# Altium PCB LowPowerDevPCB.PcbDoc
Units mil, origin at the board's own origin, x right, y up, seen from the top; angles counter-clockwise.
Board outline 2192.24 x 2324.43 mil, 2 copper layers (Top Layer, Bottom Layer), stack 65.792 mil thick; 34 components, 41 nets, 185 pads, 177 vias.
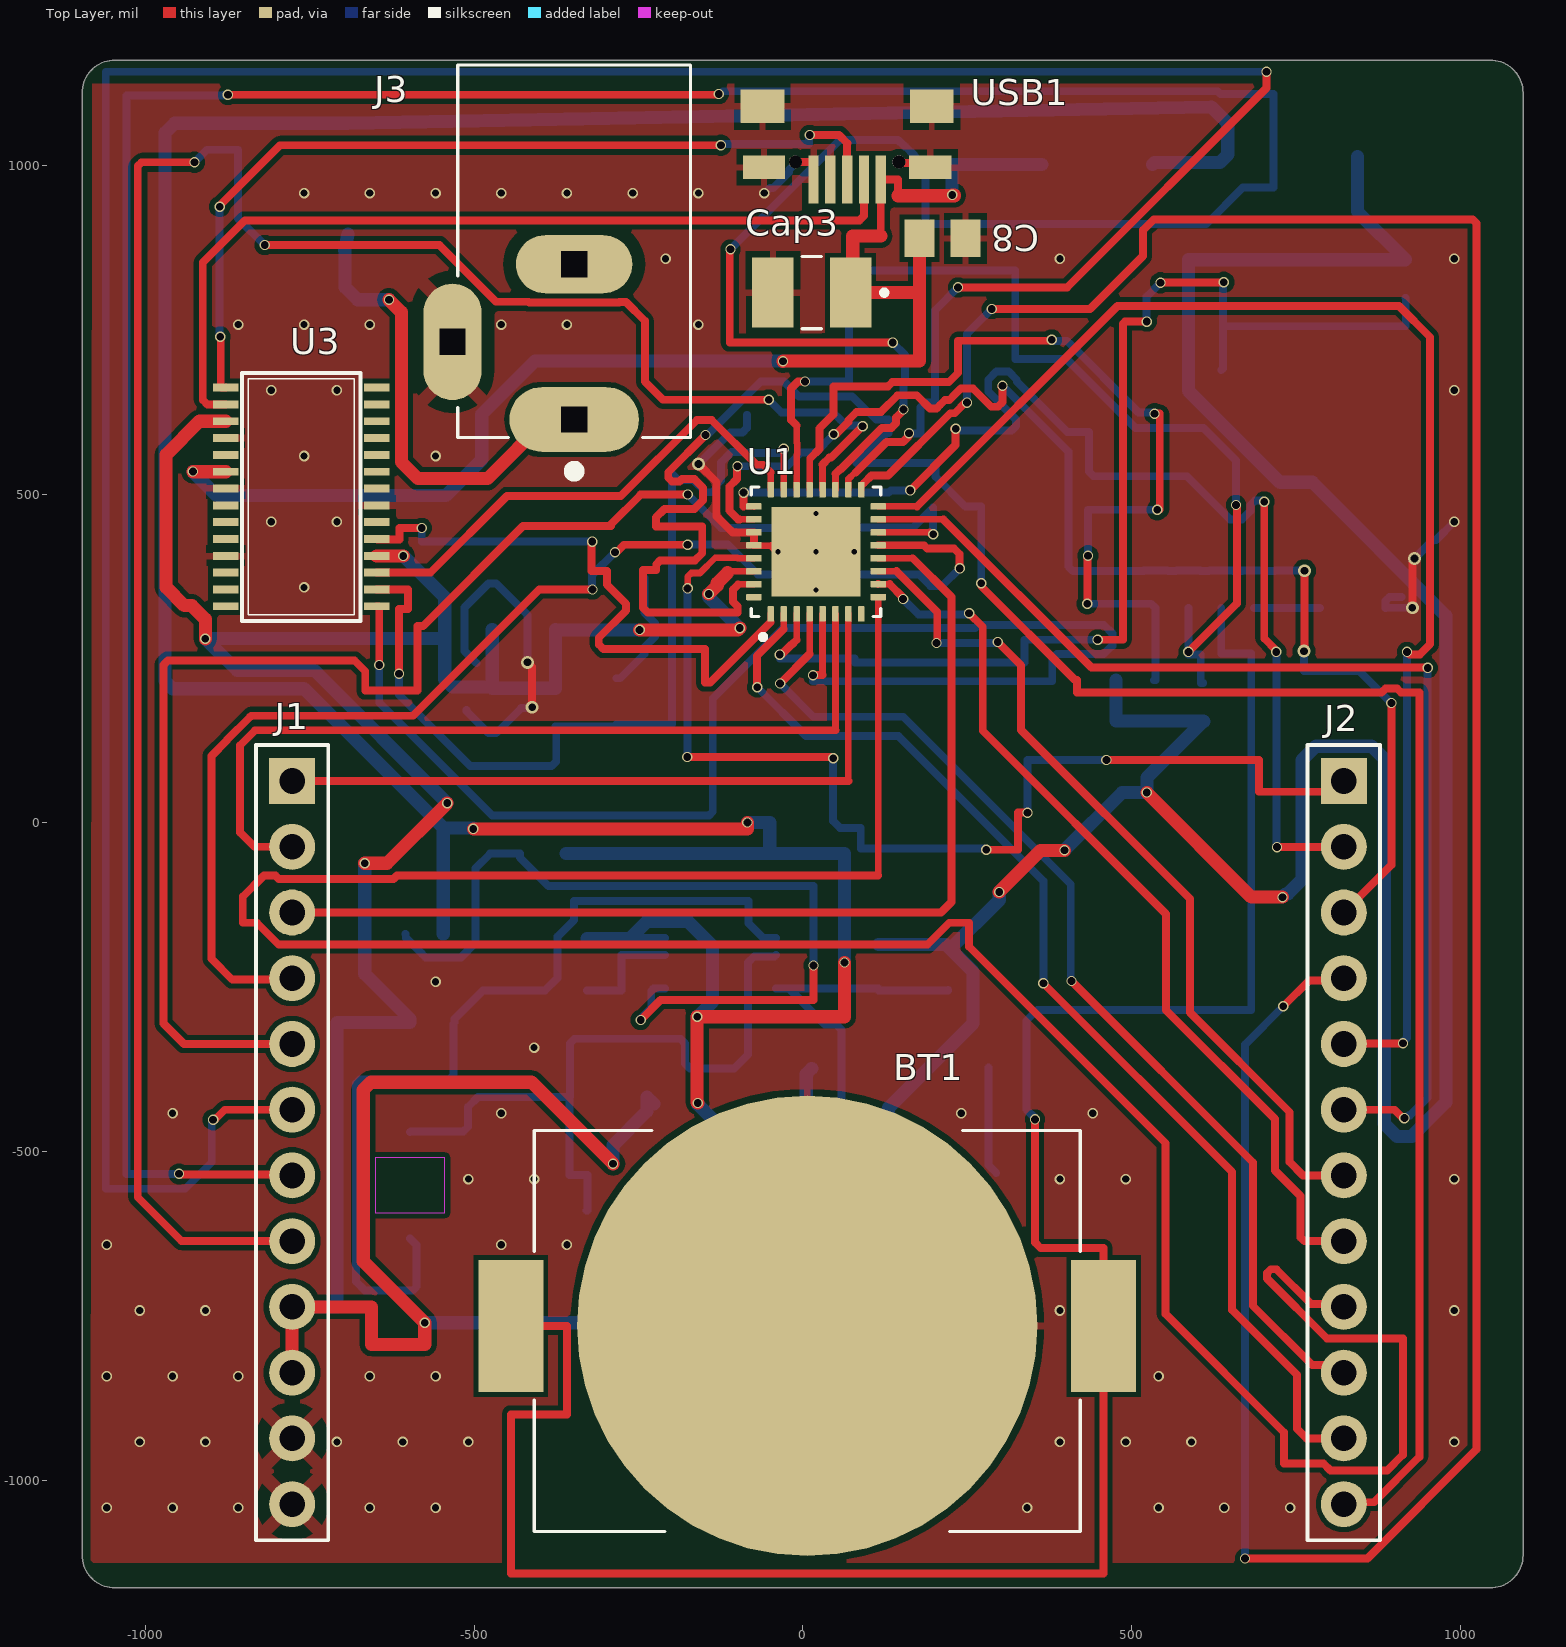
[diagram p0: Top Layer view]
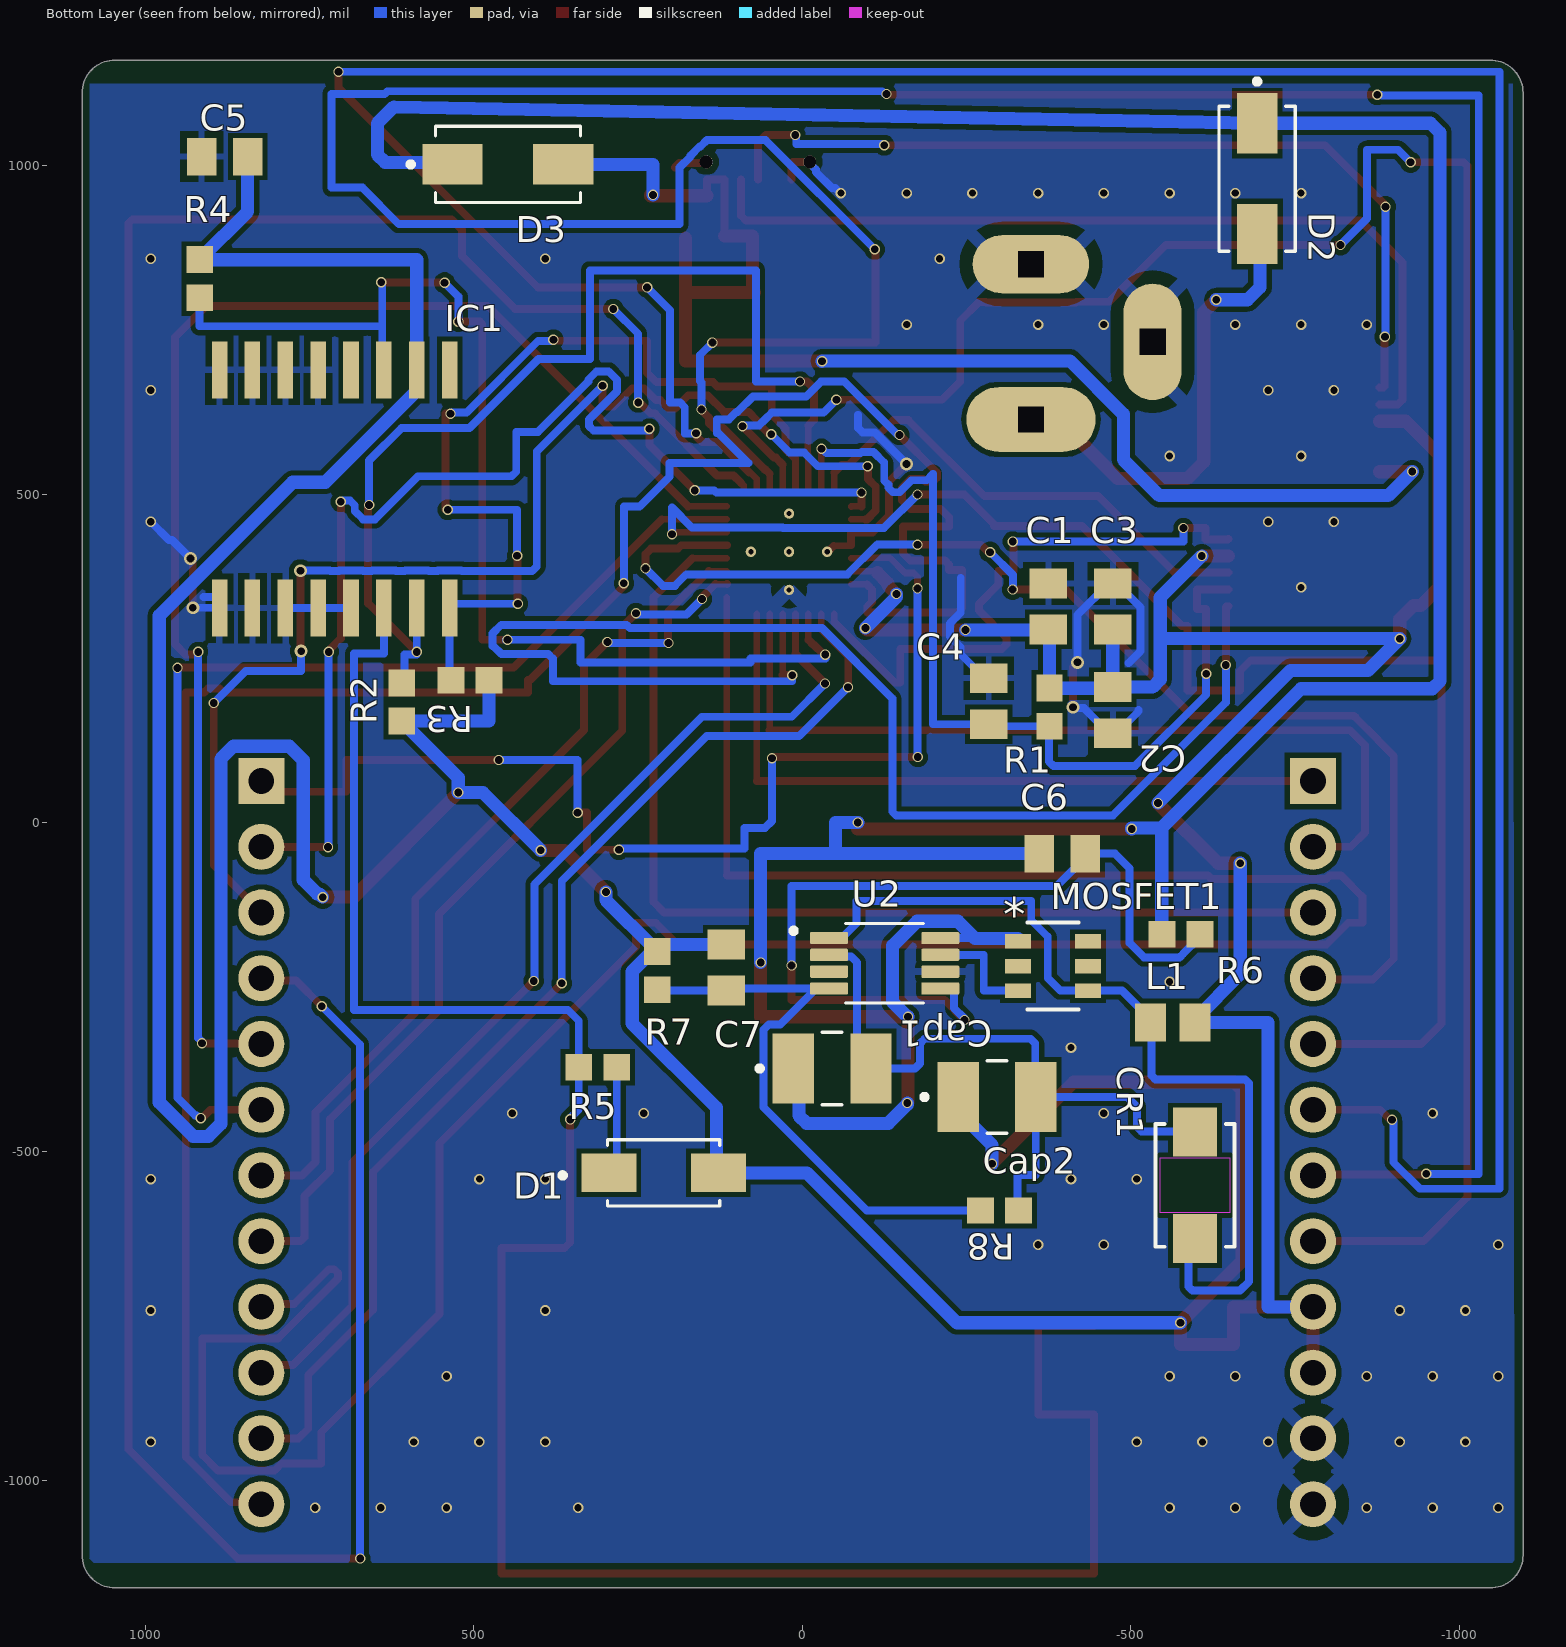
[diagram p1: Bottom Layer view, seen from below]
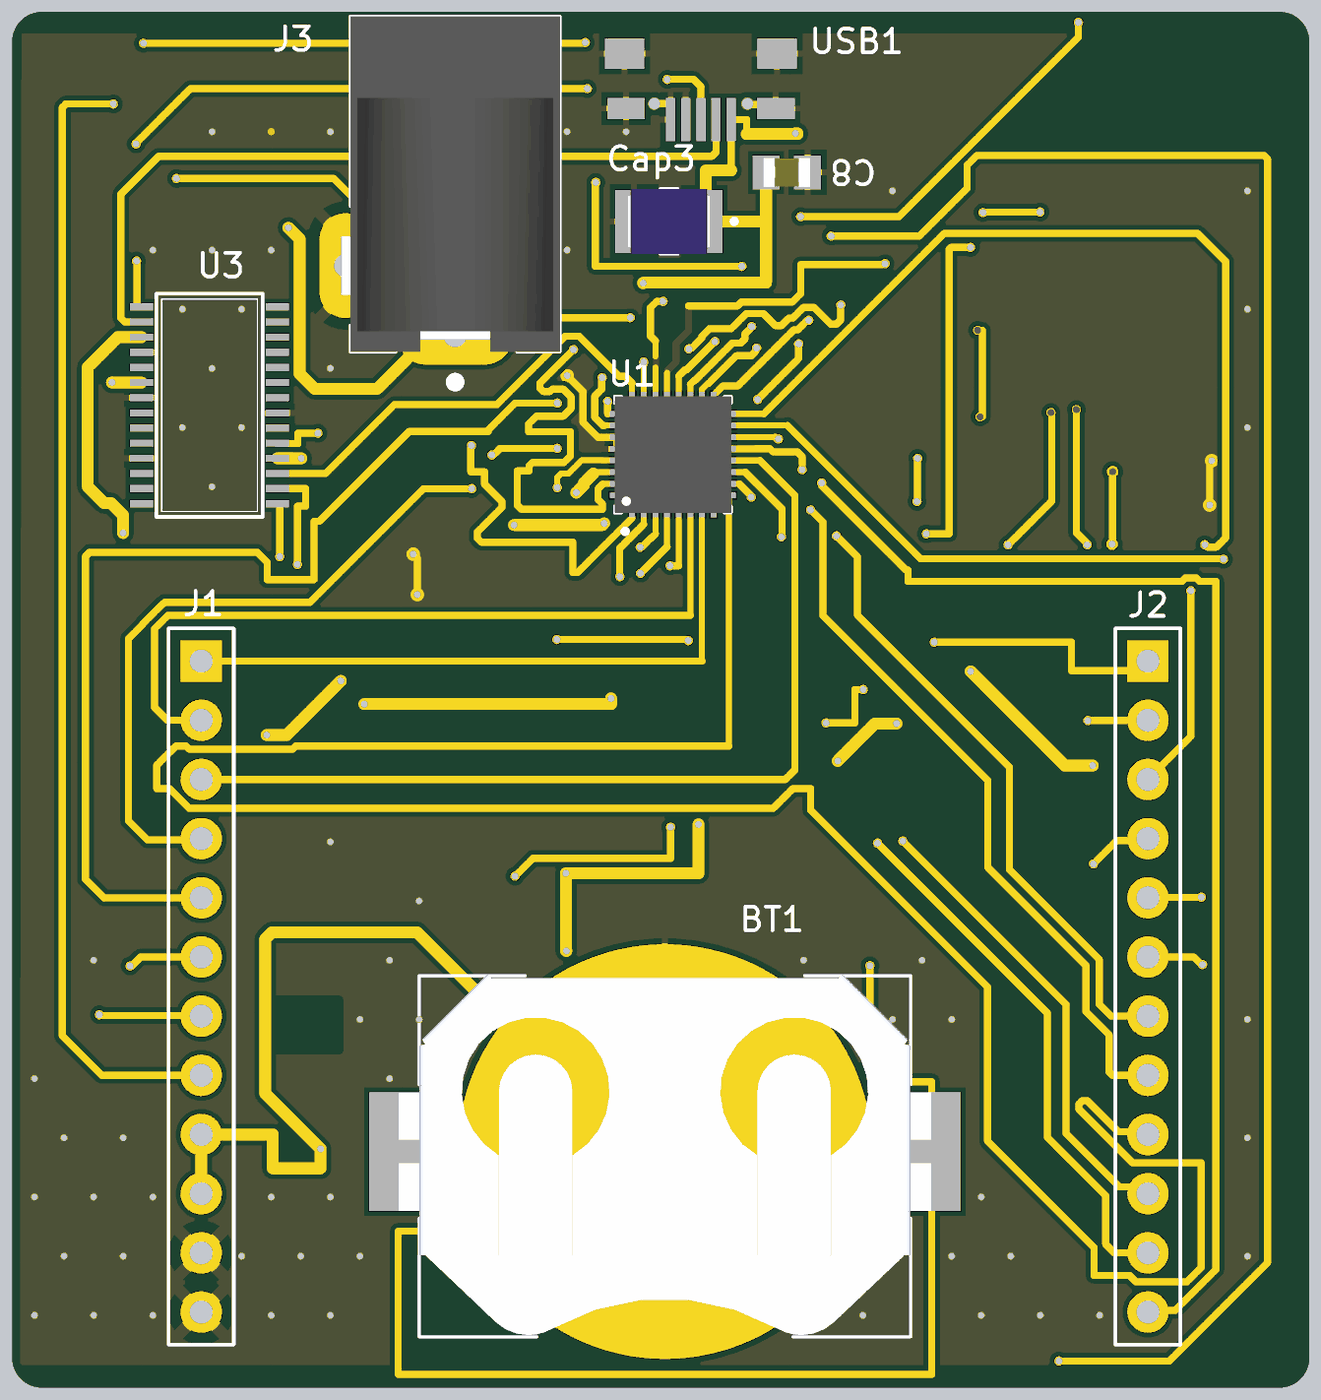
[diagram p2: 3D render of the assembled board from above, using the file's embedded part models]
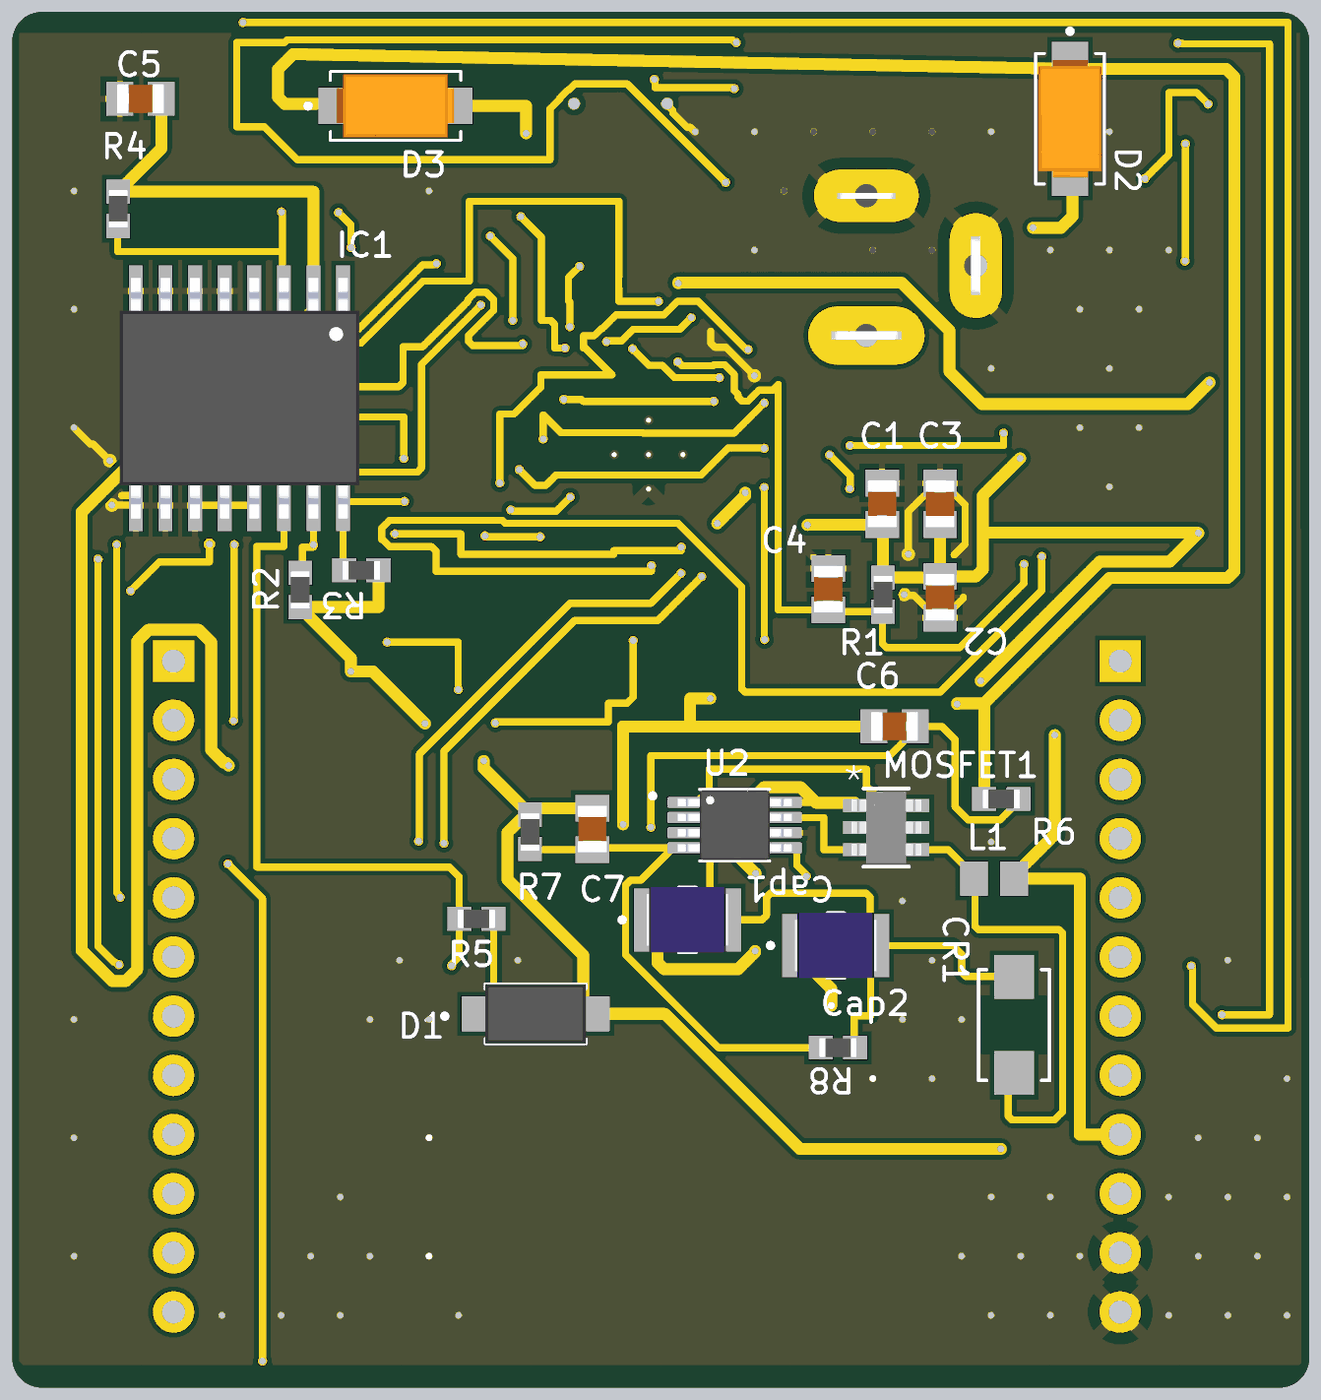
[diagram p3: 3D render of the assembled board from below, using the file's embedded part models]

## Layer stack, top to bottom
Top Solder: solder mask 0.4, Solder Resist, Dk 3.5
Top Layer: signal copper 1.4
Dielectric 1: dielectric 62.9921, FR-4, Dk 4.6
Bottom Layer: signal copper 1.4
Bottom Solder: solder mask 0.4, Solder Resist, Dk 3.5

## Board outline
-1046.49,-1163.8 1045.75,-1163.8 ccw(c1045.75,-1113.8) 1095.75,-1113.8 1095.75,1110.63 ccw(c1045.75,1110.63) 1045.75,1160.63 -1046.49,1160.63 ccw(c-1046.49,1110.63) -1096.49,1110.63 -1096.49,-1113.8 ccw(c-1046.49,-1113.8)

## Design rules (kind name [scope] priority, off if disabled: settings)
BoardOutlineClearance [All] p1: gap=7.87 ignorepadtopadclearanceinfootprint=FALSE
Clearance [All] p1: gap=7.87 ignorepadtopadclearanceinfootprint=TRUE
HoleSize [All] p1: absolutevalues=TRUE maxlimit=248.03 minlimit=7.87 maxpercent=80.000 minpercent=20.000
HoleToHoleClearance [All] p1: gap=19.68 allowstackedmicrovias=TRUE
MinimumSolderMaskSliver [All] p1: minsoldermaskwidth=3.94
PolygonConnect [All] p1: thpad.connectstyle=Relief thpad.reliefconductorwidth=19.68 thpad.reliefentries=4 thpad.polygonreliefangle="45 Angle" thpad.airgapwidth=19.68 smdpad.connectstyle=Relief smdpad.reliefconductorwidth=9.84 smdpad.reliefentries=4 smdpad.polygonreliefangle="90 Angle" smdpad.airgapwidth=9.84 via.connectstyle=Direct via.reliefconductorwidth=10 via.reliefentries=4 via.polygonreliefangle="90 Angle" via.airgapwidth=10
RoutingVias [All] p1: holewidth=11.81 width=19.68 viastyle="Through Hole" minholewidth=5.91 minwidth=9.84 maxholewidth=11.81 maxwidth=19.68
SilkToSilkClearance [All] p1: silktosilkclearance=5.91
SilkToSolderMaskClearance [IsPad] p1: minsilkscreentomaskgap=3.94 clearancetoexposedcopper=TRUE
SolderMaskExpansion [All] p1: expansion=1.5 istentingtop=FALSE
UnRoutedNet [All] p1: checkbadconnections=TRUE
Width [InNetClass('Other')] p1: maxlimit=15 minlimit=10 preferedwidth=12
Width Width_power [InNetClass('Power')] p2: maxlimit=25 minlimit=10 preferedwidth=20
24 further rules are at their usual default settings.

## Classes and differential pairs
net class Power: +3V3 +5V_USB +VBAT VIN
component class "USB Bridge": C8 U3 USB1
component class RTC: BT1 C5 D1 IC1 R2 R3 R4 R5
component class Power: C6 C7 Cap1 Cap2 Cap3 CR1 D2 D3 J3 L1 MOSFET1 R6 R7 R8 U2
component class MCU: C1 C2 C3 C4 J1 J2 R1 U1

## Components (designator, comment, footprint, x,y, rotation, side; value= is the part's Value field where it differs from the comment)
BT1 "BAT-HLD-001" BAT_BAT-HLD-001 6.76,-765.09 r0 top
C1 "Cap" Cap_0805 -374.51,329.49 r270 bottom
C2 "Cap" Cap_0805 -472.37,171.65 r90 bottom
C3 "Cap" Cap_0805 -472.37,329.39 r270 bottom
C4 "Cap" Cap_0805 -283.62,185.22 r90 bottom
C5 "Cap" Cap_0805 878.82,1013.88 r0 bottom
C6 "Cap" Cap_0805 -395.47,-46.72 r0 bottom
C7 "Cap" Cap_0805 115.36,-220 r90 bottom
C8 "Cap" Cap_0805 212.62,889.45 r180 top
Cap1 "Polarized_Cap" CAP_B3528 -45.41,-373.56 r180 bottom
Cap2 "Polarized_Cap" CAP_B3528 -296.15,-416.87 r180 bottom
Cap3 "Polarized_Cap" CAP_B3528 13.62,806.8 r180 top
CR1 "SS12-E3/61T" SMA(DO-214AC)_VIS -597.56,-551.2 r90 bottom
D1 "Diode" Diode_SMD 216.04,-532.28 r180 bottom
D2 "Diode" DO-214AC -692.02,980.14 r270 bottom
D3 "Diode" DO-214AC 447.85,1001.86 r180 bottom
IC1 "DS3231" SO16W 711.6,508 r0 bottom
J1 "DW-12-13-T-S-827" CONN12-07-F-S-200_SAI -776.96,63.76 r270 top
J2 "DW-12-13-T-S-827" CONN12-07-F-S-200_SAI 823.04,63.76 r270 top
J3 "PJ-002B" CUI_PJ-002B -347.86,613.85 r90 top
L1 "MLZ2012N220LT000" "IND - 0805" -563.62,-303.72 r180 bottom value="22 μH"
MOSFET1 "FDC5614P" TSOT23-6_419BL_ONS -381.39,-217.65 r180 bottom
R1 "Resistor" Res_0603 -376.13,176.07 r90 bottom
R2 "Resistor" Res_0603 609.22,183.93 r270 bottom
R3 "Resistor" Res_0603 505.59,217.19 r180 bottom
R4 "Resistor" Res_0603 916.54,827.97 r270 bottom
R5 "Resistor" Res_0603 311.2,-371.77 r180 bottom
R6 "Resistor" Res_0603 -575.87,-169.18 r0 bottom
R7 "Resistor" Res_0603 220.77,-224.78 r270 bottom
R8 "Resistor" Res_0603 -299.88,-589.55 r0 bottom
U1 "MSP430G2x53 QFN-32" MSP430G2x53_QFN 20.17,412.6 r90 top
U2 "LM3485MM" SOP65P490X110-8N -125.28,-213.45 r180 bottom
U3 "PL2303HX" TSSOP28 -767.11,485.34 r180 top
USB1 "USB_Socket" "MICRO QTZB5.0" 67.47,978.66 r180 top

## Footprints (in the part's own frame and the unit in brackets; to place one, negate y for a bottom-side part, rotate by r counter-clockwise, add the part's x,y. Pads: shape width x height; smd on the part's side, far side on the other; paste and mask are expansions set on the pad)
BAT_BAT-HLD-001 [mm]
  round 17.8 smd paste-10: N-(0,0)
  rect 2.5x5.1 smd: P+(-11.45,0) P+(11.45,0)
  silkscreen extent -10.55,-7.95 10.55,7.55, body extent -11.43,-7.87 11.43,7.62, height 4.32
Cap_0805 [mm]
  rect 1.15x1.45 smd: 1(-0.889,0) 2(0.889,0)
  body extent -1,-0.62 1.01,0.63, height 0.94
CAP_B3528 [mm]
  rect 1.6x2.7 smd: 1(-1.5,0) 2(1.5,0)
  silkscreen extent -2.9,-1.4 0.38,1.4, body extent -1.75,-1.4 1.75,1.4, height 1.9
CONN12-07-F-S-200_SAI [mil]
  rect 70x70 hole 39: 1(0,0)
  round 70 hole 39: 2(100,0) 3(200,0) 4(300,0) 5(400,0) 6(500,0) 7(600,0) 8(700,0) 9(800,0) 10(900,0) 11(1000,0) 12(1100,0)
  silkscreen extent -55,-55 1155,55
CUI_PJ-002B [mm]
  oval 2.5x5 hole 1 square: 1(0,0)
  oval 2.25x4.5 hole 1 square: 2(6,0)
  oval 4.5x2.25 hole 1 square: 3(3,4.7)
  silkscreen extent -2.2,-4.5 13.7,4.5, body extent -0.7,-4.5 13.7,4.9, height 11
Diode_SMD [mm]
  rect 2.12x1.5 smd: A(2.242,0) C(-1.988,0)
  silkscreen extent -3.87,-1.28 2.29,1.28, body extent -2.44,-1.28 2.7,1.28, height 1.15
DO-214AC [mm]
  rect 2.33x1.56 smd: A(2.14,0) C(-2.14,0)
  silkscreen extent -3.85,-1.47 2.8,1.48, body extent -2.53,-1.35 2.52,1.35, height 2.37
"IND - 0805" [mm]
  rect 1.2x1.47 smd: 1(-0.86,0) 2(0.86,0)
"MICRO QTZB5.0" [mm] "MICRO QTZB5.0"
  rect 0.4x1.85 smd: 1(-1.3,0) 2(-0.65,0) 3(0,0) 4(0.65,0) 5(1.3,0)
  round 0.5 hole 0.5 paste+0 mask+0: NC1(-2,-0.685) NC2(2,-0.685)
  rect 1.625x0.9 smd: SH1(-3.212,-0.475) SH2(3.213,-0.475)
  rect 1.69x1.3 smd: SH3(-3.27,-2.835) SH6(3.27,-2.835)
MSP430G2x53_QFN [mm] "32 PIN QFN."
  rrect25% 0.6x0.25 smd mask+0: 1(-2.4,1.75) 2(-2.4,1.25) 3(-2.4,0.75) 4(-2.4,0.25) 5(-2.4,-0.25) 6(-2.4,-0.75) 7(-2.4,-1.25) 8(-2.4,-1.75) 17(2.4,-1.75) 18(2.4,-1.25) 19(2.4,-0.75) 20(2.4,-0.25) 21(2.4,0.25) 22(2.4,0.75) 23(2.4,1.25) 24(2.4,1.75)
  rrect25% 0.25x0.6 smd mask+0: 9(-1.75,-2.4) 11(-0.75,-2.4) 12(-0.25,-2.4) 13(0.25,-2.4) 14(0.75,-2.4) 15(1.25,-2.4) 16(1.75,-2.4) 25(1.75,2.4) 26(1.25,2.4) 27(0.75,2.4) 28(0.25,2.4) 29(-0.25,2.4) 30(-0.75,2.4) 31(-1.25,2.4) 32(-1.75,2.4)
  rrect25% 0.25x0.6 smd mask+0.038: 10(-1.25,-2.4)
  rect 3.45x3.45 smd paste-3 mask+0: 33(0,0)
  round 0.4 hole 0.2 mask+0: 34(0,0) 35(0,1.475) 36(-1.475,0) 37(0,-1.475) 38(1.475,0)
  silkscreen extent -3.39,-2.5 2.5,2.5, body extent -2.5,-2.5 2.5,2.5, height 0.99
Res_0603 [mm]
  rect 1.04x1.02 smd: 1(-0.735,0) 2(0.735,0)
  body extent -0.8,-0.4 0.8,0.4, height 0.55
SMA(DO-214AC)_VIS [mil]
  rect 74x67 smd paste+0 mask+0: 1(-81,0) 2(81,0)
  Top Layer keep-out region: -42,-53 -42,53 42,53 42,-53
  Keep-Out Layer region: -42,-53 -42,53 42,53 42,-53
  silkscreen extent -94,-60 93,60
SO16W [mm]
  rect 0.6x2.2 smd: 1(-4.445,-4.6) 2(-3.175,-4.6) 3(-1.905,-4.6) 4(-0.635,-4.6) 5(0.635,-4.6) 6(1.905,-4.6) 7(3.175,-4.6) 8(4.445,-4.6) 9(4.445,4.6) 10(3.175,4.6) 11(1.905,4.6) 12(0.635,4.6) 13(-0.635,4.6) 14(-1.905,4.6) 15(-3.175,4.6) 16(-4.445,4.6)
  body extent -5.15,-5.16 5.15,5.16, height 2.65
SOP65P490X110-8N [mm]
  rrect25% 1.47x0.48 smd: 1(-2.15,0.975) 2(-2.15,0.325) 3(-2.15,-0.325) 4(-2.15,-0.975) 5(2.15,-0.975) 6(2.15,-0.325) 7(2.15,0.325) 8(2.15,0.975)
  silkscreen extent -3.62,-1.54 1.5,1.53, body extent -2.45,-1.5 2.45,1.5, height 1.1
TSOT23-6_419BL_ONS [mil]
  rect 39.5x22 smd paste+0 mask+0: 1(-53.25,37.4) 2(-53.25,0) 3(-53.25,-37.4) 4(53.25,-37.4) 5(53.25,0) 6(53.25,37.4)
  silkscreen extent -38,-66 39,66, body extent -59,-61 59,61, height 43
TSSOP28 [mil]
  rect 39x12 smd: 1(-119.01,155.71) 2(-119.01,130.12) 3(-119.01,104.53) 4(-119.01,78.94) 5(-119.01,53.35) 6(-119.01,27.76) 7(-119.01,2.17) 8(-119.01,-23.42) 9(-119.01,-49.02) 10(-119.01,-74.61) 11(-119.01,-100.2) 12(-119.01,-125.79) 13(-119.01,-151.38) 14(-119.01,-176.97) 15(110.74,-176.97) 16(110.74,-151.38) 17(110.74,-125.79) 18(110.74,-100.2) 19(110.74,-74.61) 20(110.74,-49.02) 21(110.74,-23.42) 22(110.74,2.17) 23(110.74,27.76) 24(110.74,53.35) 25(110.74,78.94) 26(110.74,104.53) 27(110.74,130.12) 28(110.74,155.71)
  silkscreen extent -94,-199 86,178

## Part data
BT1: "Battery Retainer Coin, 20.0mm 1 Cell SMD (SMT) Tab", Package=None, Availability=Unavailable, MP=BAT-HLD-001, Price=None
C1 C2: Capacitance="47 µF"
C3: Capacitance=100nF
C4: Capacitance="1 nF"
C5: Capacitance=1.0μF
CR1: "No Description Available", Mfr_Name=Vishay
IC1: "Real Time Clock (RTC) IC Clock/Calendar - IÂ²C, 2-Wire Serial 8-SOIC (0.154, 3.90mm Width)", Package="SOIC-16 Maxim Integrated", Availability="In Stock", Check_prices=https://www.snapeda.com/parts/DS3231/Maxim+Integrated/view-part/?ref=eda, MF="Maxim Integrated", MP=DS3231, Price=None, Purchase-URL=https://pricing.snapeda.com/search/part/DS3231/?ref=eda, SnapEDA_Link=https://www.snapeda.com/parts/DS3231/Maxim+Integrated/view-part/?ref=snap
J1 J2: "No Description Available", Mfr_Name="Samtec Inc", RefDes=RefDes, Type=Type
J3: "2.5 x 6.5 mm, 2.5 A, Horizontal, Through Hole, Dc Power Jack Connector", Package=None, Availability="In Stock", Check_prices=https://www.snapeda.com/parts/PJ-002B/CUI+Devices/view-part/?ref=eda, CUI_purchase_URL=https://www.cuidevices.com/product/interconnect/connectors/dc-power-connectors/jacks/pj-002b?utm_source=snapeda.com&utm_medium=referral&utm_campaign=snapedaBOM, MF="CUI Devices", MP=PJ-002B, Price=None, Purchase-URL=https://pricing.snapeda.com/search/part/PJ-002B/?ref=eda, SnapEDA_Link=https://www.snapeda.com/parts/PJ-002B/CUI+Devices/view-part/?ref=snap
L1: "22ÂµH Shielded Multilayer Inductor 300mA 670mOhm 0805 (2012 Metric)", Package="2012 Bourns", Availability="In Stock", Check_prices=https://www.snapeda.com/parts/MLZ2012N220LT000/TDK/view-part/?ref=eda, MF=TDK, MP=MLZ2012N220LT000, Price=None, Purchase-URL=https://pricing.snapeda.com/search/part/MLZ2012N220LT000/?ref=eda, SnapEDA_Link=https://www.snapeda.com/parts/MLZ2012N220LT000/TDK/view-part/?ref=snap
MOSFET1: "No Description Available", Mfr_Name=onsemi, RefDes=RefDes, Type=Type
R2 R3: Resistance=2.6kΩ
R4: Resistance=4.7kΩ
R5: Resistance=200Ω
U1: "QFN-32-EP(5x5) Microcontroller Units (MCUs/MPUs/SOCs) ROHS. Texas Instruments.", Package=None, Availability=Unavailable, ComponentLink1Description=LSCS, ComponentLink1URL=https://www.lcsc.com/product-detail/Microcontroller-Units-MCUs-MPUs-SOCs_Texas-Instruments-MSP430G2553IRHB32R_C27832.html, MP=MSP430G2553IRHB32R, Price=None
U2: "4.5-35V, Hysteretic Non-Synchronous PFET Buck Controller", Package="VSSOP-8 Texas Instruments", Availability="In Stock", Check_prices=https://www.snapeda.com/parts/LM3485MMX/NOPB/Texas+Instruments/view-part/?ref=eda, MF="Texas Instruments", MP=LM3485MMX/NOPB, Price=None, Purchase-URL=https://pricing.snapeda.com/search?q=LM3485MMX/NOPB&ref=eda, SnapEDA_Link=https://www.snapeda.com/parts/LM3485MMX/NOPB/Texas+Instruments/view-part/?ref=snap
U3: "USB to RS232 TSSOP28", Package=None, Availability=Unavailable, MF="Prolific Technology", MP=PL-2303HX, Price=None, SnapEDA_Link=https://www.snapeda.com/parts/PL-2303HX/Prolific%20Technology/view-part/598561/?ref=snap
C6: Parameter 1=1nF
C7: Parameter 1=100pF
C8: Parameter 1=100nF
Cap1: Parameter 1=100μF
Cap2: Parameter 1=22μF
Cap3: Parameter 1=10μF
R1: Parameter 1=10kΩ
R6: Parameter 1=240kΩ
R7: Parameter 1=33kΩ
R8: Parameter 1=20kΩ

## Via types
v1: diameter 15.75, hole 11.81, Top Layer to Bottom Layer, 102 vias
v2: diameter 16, hole 11, Top Layer to Bottom Layer, tented both sides, 68 vias
v3: diameter 19.68, hole 11.81, Top Layer to Bottom Layer, 7 vias

## Nets (pads, with @x,y where several pads share a name; then routed paths per layer and width w, separated by ;. In a path a pad name is that pad's centre, name@x,y a point inside that pad or via, vN(x,y) a via of type N, cw(c..) or ccw(c..) an arc to the next point about the centre after c; other vN are vias at no path point)
+3V3: C1.2 C2.2 C3.2 C5.1 C7.2 Cap2.1 D1.A IC1.2 J1.9 J1.10 L1.2 R1.2 R2.2 R3.2 R4.1 R7.1 U1.30 U3.4 U3.17 | length 10076.4
  Top Layer w10: -114.36,380.57 -110.82,380.57 -108.32,383.07 U1.30
  Top Layer w20: v1(-908.96,280.17) -908.96,309.96 -929.72,330.72 -940.85,330.72 -968.67,358.53 -968.67,560.45 -918,611.12 U3.17 ; J1.10 J1.9 -655.91,-736.24 -655.91,-793.48 -575.18,-793.48 v1(-575.18,-760.46) -668.8,-666.84 -668.8,-406.11 -657.09,-394.39 -412.61,-394.39 -291.48,-515.53 v1(-288.64,-518.36) ; v1(-666.36,-61.24) -632.56,-61.24 v1(-541.08,30.24) ; U3.4 -621.17,406.4 -621.06,406.29 v1(-607.82,406.29) ; v1(-248.31,293.7) -98.72,293.7 v1(-95.97,296.46) ; v1(-143.1,348.3) -130.1,361.29 -130.1,364.82 -114.36,380.57 ; v1(298.84,-104.93) 362.08,-41.69 v1(398.08,-41.69) ; v1(523.4,46.3) 682.55,-112.85 v1(729.74,-112.85)
  Bottom Layer w20: J1.9 -708.5,-736.24 -708.5,-303.72 L1.2 -597.48,-298.41 -666.36,-229.52 v1(-666.36,-61.24) ; v1(-607.82,406.29) -544.61,343.08 -544.61,280.72 ; v1(-575.18,-760.46) -235.22,-760.46 -7.05,-532.28 D1.A 130.55,-529.5 130.55,-433.38 258.72,-305.21 258.72,-225.84 R7.1@224.55,-191.67 ; v1(-541.08,30.24) -742.86,232.02 -860.81,232.02 v1(-908.96,280.17) -907.5,280.17 -906.95,280.72 -544.61,280.72 ; C2.2@-472.37,205.01 R1.2 -376.13,294.49 -375.46,293.82 -248.43,293.82 v1(-248.31,293.7) ; C3.2 C2.2 -532.89,206.65 -544.61,218.36 -544.61,280.72 ; v1(-288.64,-518.36) -288.64,-490.08 -237.09,-438.53 Cap2.1 Cap2.1@-226.73,-427.24 ; v1(-143.1,348.3) -143.1,343.59 v1(-95.97,296.46) ; C7.2 217.88,-185 R7.1@224.55,-191.67 ; v1(298.84,-104.93) 298.84,-117.38 R7.1@224.55,-191.67 ; v1(398.08,-41.69) 486.06,46.3 v1(523.4,46.3) 523.4,68.78 609.22,154.6 R2.2 ; R3.2 476.65,155 R2.2 ; R2.2@609.94,154.28 R2.2 ; v1(729.74,-112.85) 734.6,-108 738.07,-108 759.35,-86.71 759.35,95.35 780.64,116.63 865.44,116.63 884.6,97.47 884.6,-457.61 903.76,-476.77 926.72,-476.77 978.36,-425.13 978.36,315.53 775.47,518.42 725.78,518.42 586.6,657.61 IC1.2 586.6,856.91 913.82,856.91 R4.1 916.55,857.3 843.82,930.03 C5.1
+5V_USB: C8.2 Cap3.1 D3.A U3.20 USB1.1 | length 2127.2
  Top Layer w12: 118.65,892.82 USB1.1 144.87,978.66 144.87,954.19
  Top Layer w20: v1(-927.85,534.58) -927.62,534.35 U3.20 ; v1(-30.07,702.3) -30.07,703.03 177.62,703.03 177.62,806.8 ; Cap3.1 Cap3.1@75.91,806.8 ; 118.65,892.82 75.91,892.82 Cap3.1@75.91,806.8 ; 144.87,954.19 230.55,954.19 230.55,955.51 v1(227.23,955.51) ; C8.2 177.62,806.8 ; Cap3.1@75.91,806.8 177.62,806.8
  Bottom Layer w20: v1(-927.85,534.58) -891.28,498 -543.29,498 -488.49,552.8 -488.49,621.78 -407.24,703.03 -30.07,703.03 v1(-30.07,702.3) ; v1(227.23,955.51) 227.23,1001.86 D3.A
+VBAT: D2.A J3.1 | length 721.7
  Top Layer w20: v1(-629.58,795.92) -610.72,777.06 -610.72,549.13 -585.38,523.79 -479.65,523.79 -389.6,613.85 J3.1
  Bottom Layer w20: D2.A -697.21,871.33 -696.31,870.43 -696.31,814.98 -677.25,795.92 v1(-629.58,795.92)
GND: BT1.N- C1.1 C2.1 C3.1 C4.2 C5.2 C8.1 Cap3.2 IC1.5 IC1.6 IC1.7 IC1.8 IC1.9 IC1.10 IC1.11 IC1.12 IC1.13 J1.11 J1.12 J3.2 J3.3 U1.27 U1.28 U1.33 U1.34 U1.35 U1.36 U1.37 U1.38 U2.6 U3.7 U3.18 U3.21 U3.25 USB1.4 USB1.5 USB1.NC1 USB1.NC2 USB1.SH1 USB1.SH2 USB1.SH3 USB1.SH6 | length 1534
  Top Layer w10: U1.28 -73.43,421.55 -47.86,421.55
  Top Layer w12: v3(-418.69,244.44) -411.77,237.52 v3(-411.77,176.07) ; v3(-158.56,545.96) -131.68,519.07 -131.68,466.99 -106.52,441.83 -74.61,441.83 U1.27 U1.28 ; -47.86,421.55 -38.91,412.6 U1.35 ; USB1.NC2 14.41,1005.63 16.28,1003.76 USB1.5 ; USB1.NC1 147.68,1004.16 187.15,1004.16 USB1.SH1 ; v3(927.31,327.39) 927.31,396.78 930.77,400.24 v3(930.77,402.32)
  Bottom Layer w12: -511.74,171.65 -511.74,170.11 -478.27,136.65 C2.1 -466.46,136.65 -428.51,174.6 -413.24,174.6 v3(-411.77,176.07) ; -496.24,243.16 -514.79,261.7 -514.79,327.88 -478.28,364.39 C3.1 -466.47,364.39 -418.69,316.62 v3(-418.69,244.44) ; C4.2 -277.72,220.22 -241.09,256.85 -241.09,267.15 -224.43,283.81 -224.43,303.59 -241.09,320.24 -241.09,372.48 ; v3(-158.56,545.96) -110.43,594.09 -91.82,594.09 -84.79,601.12 -84.79,621.06 ; v2(-58.76,958.27) -57.68,958.27 -50.1,965.84 -44.99,965.84 -20.6,990.24 -20.6,994.22 -11.27,1003.55 USB1.NC2 ; IC1.13 IC1.12 IC1.11 ; 910.8,343.54 892.41,343.54 886.6,337.73 IC1.9 887.09,327.39 v3(927.31,327.39) ; v3(930.77,402.32) 958.83,430.38 963.34,430.38 v2(991.24,458.27)
  other v2: -1058.76,-1041.73 -958.76,-1041.73 -858.76,-1041.73 -658.76,-1041.73 -558.76,-1041.73 341.24,-1041.73 541.24,-1041.73 641.24,-1041.73 741.24,-1041.73 -1008.76,-941.73 -908.76,-941.73 -708.76,-941.73 -608.76,-941.73 -508.76,-941.73 391.24,-941.73 491.24,-941.73 591.24,-941.73 991.24,-941.73 -1058.76,-841.73 -958.76,-841.73 -858.76,-841.73 -658.76,-841.73 -558.76,-841.73 541.24,-841.73 -1008.76,-741.73 -908.76,-741.73 391.24,-741.73 991.24,-741.73 -1058.76,-641.73 -458.76,-641.73 -358.76,-641.73 -508.76,-541.73 -408.76,-541.73 391.24,-541.73 491.24,-541.73 991.24,-541.73 -958.76,-441.73 -458.76,-441.73 241.24,-441.73 441.24,-441.73 -408.76,-341.73 -558.76,-241.73 -758.76,358.27 -808.76,458.27 -708.76,458.27 -758.76,558.27 -558.76,558.27 -808.76,658.27 -708.76,658.27 991.24,658.27 -858.76,758.27 -758.76,758.27 -658.76,758.27 -458.76,758.27 -358.76,758.27 -158.76,758.27 -208.76,858.27 391.24,858.27 991.24,858.27 -758.76,958.27 -658.76,958.27 -558.76,958.27 -458.76,958.27 -358.76,958.27 -258.76,958.27 -158.76,958.27
NetBT1_P+: BT1.P+ IC1.14 R5.1 | length 3399.1
  Top Layer w12: BT1.P+@-444.03,-765.09 -358.98,-765.09 -358.98,-899.74 -443.9,-899.74 -443.9,-1141.56 457.55,-1141.56 457.55,-765.09 457.55,-646.89 362.04,-646.89 353.22,-638.07 v1(353.22,-450.95)
  Bottom Layer w12: v1(353.22,-450.95) 353.22,-448.87 340.14,-435.79 R5.1 340.14,-300.92 356.79,-284.27 682.32,-284.27 682.32,257.53 636.6,257.53 IC1.14
NetC4_1: C4.1 R1.1 U1.23 U3.2 | length 1415.5
  Top Layer w10: U1.23 v1@-29.04,564.53
  Top Layer w12: U3.2 -600.43,355.22 -600.43,325.58 -614.4,325.58 v1(-614.4,227.13) ; v1(-29.23,569.24) -29.23,564.72 v1@-29.04,564.53
  Bottom Layer w12: v1(-614.4,227.13) -614.4,195.08 -505.84,86.52 -382.05,86.52 -375.02,93.55 -375.02,146.03 R1.1 -283.62,147.13 C4.1 -198.96,150.22 -198.96,531.22 -189.19,521.45 -166.13,521.45 -147.81,503.13 -137.87,503.13 -130.84,510.16 -130.84,514.64 -124.69,520.79 -124.69,548.12 -108.36,564.45 -90.35,564.45 -88.47,562.57 -38.13,562.57 -36.91,562.57 -30.24,569.24 v1(-29.23,569.24)
NetC6_1: C6.1 R6.1 U2.5 | length 1311.8
  Top Layer w12: v1(-246.7,-299.72) -216.49,-269.51 16.29,-269.51 v1(16.29,-216.87)
  Bottom Layer w12: R6.1 R6.1@-604.41,-169.18 ; R6.1@-603.39,-175.01 -579.26,-199.14 ; -580.28,-198.12 -573.77,-204.63 -520.09,-204.63 -497.85,-182.39 -497.85,-68.96 -475.61,-46.72 C6.1 -430.47,-52.63 -387.1,-96 16.29,-96 v1(16.29,-216.87) v1@16.29,-217.06 ; v1(-246.7,-299.72) -246.7,-297.64 -230.5,-281.43 -230.5,-255.29 -227.05,-251.84 U2.5
NetC7_1: C7.1 R7.2 R8.2 U2.4 | length 884.9
  Bottom Layer w12: R8.2 -98.08,-589.55 59.02,-432.45 59.02,-314.66 50.89,-306.53 33.55,-306.53 U2.4@-21.14,-251.84 ; U2.4 U2.4@-21.14,-251.84 ; R7.2 220.76,-255 C7.1 115.36,-251.84 U2.4@-21.14,-251.84
NetCap1_2: Cap1.2 Cap2.2 CR1.2 R8.1 U2.2 | length 1073.2
  Bottom Layer w12: CR1.2 -596.51,-469.15 -516.12,-469.15 -509.09,-462.12 -509.09,-431.74 -494.22,-416.87 Cap2.2 ; R8.1 -327.26,-589.55 -327.26,-535.44 -355.2,-535.44 Cap2.2 ; U2.2 -42.9,-202.92 -73.93,-202.92 -83.44,-212.43 -83.44,-352.54 Cap1.2 -171.47,-373.55 -179.06,-365.97 -179.06,-335.36 -186.09,-328.33 -347.31,-328.33 -354.34,-335.36 -354.34,-416.01 Cap2.2
NetCR1_1: CR1.1 L1.1 MOSFET1.4 U2.1 | length 1376.6
  Bottom Layer w12: CR1.1 -587.63,-642.13 -587.63,-705.47 -593.49,-711.32 -665.99,-711.32 -679.54,-697.78 -679.54,-396 -673.68,-390.14 -537.38,-390.14 -531.52,-384.28 L1.1@-531.52,-305.48 ; L1.1 -529.77,-298.41 -486.41,-255.05 MOSFET1.4 -392.4,-255.05 -373.33,-235.98 -373.33,-172.94 -348.21,-147.82 -348.21,-118.87 -82.52,-118.87 -82.52,-152.66 -60.12,-175.06 U2.1
NetD1_C: D1.C R5.2 | length 165.5
  Bottom Layer w12: R5.2 282.26,-520.24 D1.C
NetIC1_3: IC1.3 R4.2 U1.3 | length 1786.1
  Top Layer w10: -9.35,278.59 U1.3
  Top Layer w12: v1(-35.06,256.15) -32.44,256.15 -17.06,271.52 -16.42,271.52 -9.35,278.59 ; v1(448.48,278.74) 486.96,278.74 486.96,759.51 490.15,762.7 v1(523.19,762.7) ; v1(544.23,821.72) 544.64,822.12 640.16,822.12 v1(640.56,822.53)
  Bottom Layer w12: v1(-35.06,256.15) -35.06,250.42 79.03,250.42 79.03,244.15 337.46,244.15 337.46,278.74 v1(448.48,278.74) 451.17,278.74 v1@451.17,278.59 ; v1(523.19,762.7) 523.19,800.67 v1(544.23,821.72) ; IC1.3 639.09,691.59 639.09,755.69 ; v1(640.56,822.53) 639.09,821.05 639.09,755.69 ; R4.2 917.31,799.04 917.31,755.69 639.09,755.69
NetIC1_15: IC1.15 R2.1 U1.22 | length 1667.3
  Top Layer w10: U1.22 -9.35,559.77 -8.48,560.64 -8.48,577.83 -9.35,578.71 -9.35,604.68
  Top Layer w12: -9.35,604.68 -17.93,613.26 -17.93,660.87 -7.19,671.61 v1(3.46,671.61) ; v1(586.6,260.23) 660.48,334.11 660.48,483.7 v1(659.08,483.7)
  Bottom Layer w12: v1(3.46,671.61) 70.36,671.61 70.36,693.28 70.63,693.55 70.63,712.5 70.36,712.78 70.36,840.61 323.13,840.61 323.13,705.85 401.26,705.85 506.18,600.93 609.51,600.93 659.08,551.37 v1(659.08,483.7) ; IC1.15 v1(586.6,260.23) 586.6,256.16 605.36,256.16 605.36,212.87 R2.1
NetIC1_16: IC1.16 R3.1 U1.21 | length 1387.4
  Top Layer w10: U1.21 10.33,551.01
  Top Layer w12: 11.4,554.9 25.45,568.95 25.45,600.29 46.46,621.3 46.46,663.98 129.4,663.98 136.03,670.61 222,670.61 236.31,684.92 236.31,733.6 374.57,733.6 376.25,735.28 v1(378.69,735.28) ; v1(432.65,333.43) 433.27,334.05 433.27,405.78 v1(433.89,406.4) ; v1@534.44,621.96 v1(535.16,622.68) 543.07,622.68 543.07,476.45 v1(539.32,476.45)
  Bottom Layer w12: v1(378.69,735.28) 380.54,733.43 401.79,733.43 510.69,624.53 533.31,624.53 v1(535.16,622.68) ; v1(432.65,333.43) 530.07,333.43 IC1.16 536.6,217.19 R3.1 ; v1@434.01,406.52 v1(433.89,406.4) 433.89,476.45 v1(539.32,476.45)
NetJ1_1: J1.1 U1.7 | length 1100.7
  Top Layer w10: 69.39,63.76 U1.7
  Top Layer w12: J1.1 69.39,63.76
NetJ1_2: J1.2 U1.6 | length 1312.9
  Top Layer w10: 49.7,141.06 U1.6
  Top Layer w12: J1.2 -834.22,-36.24 -855.98,-14.49 -855.98,118.27 -833.18,141.06 49.7,141.06
NetJ1_3: J1.3 U1.12 | length 1609.7
  Top Layer w10: U1.12@114.74,402.68 167.19,402.68 ; 226.23,342.23 226.23,343.64
  Top Layer w12: J1.3 210.29,-136.24 226.23,-120.31 226.23,342.23 ; 167.19,402.68 226.23,343.64
NetJ1_4: J1.4 U1.13 | length 1919.9
  Top Layer w12: J1.4 -779.15,-238.43 -867.87,-238.43 -899.74,-206.56 -899.74,101.95 -875.85,125.84 -875.85,126.5 -841.42,160.94 -840.75,160.94 -838.63,163.06 -592.96,163.06 -400.94,355.08 v1(-319.89,355.08) ; v1(-285.74,412) -283.12,412 -271.91,423.2 v1(-175.24,423.2) ; U1.13 158.84,422.44 158.96,422.55 184.12,422.55 189.33,417.35 230.23,417.35 238.65,408.92 v1(238.65,387.26)
  Bottom Layer w12: v1(-319.89,355.08) -320.65,355.84 -320.65,377.09 v1(-285.74,412) ; v1(-175.24,423.2) -174.68,423.76 -114.1,423.76 -68.56,378.21 176.41,378.21 193.96,360.67 212.06,360.67 v1(238.65,387.26)
NetJ1_5: J1.5 U1.14 | length 2306.6
  Top Layer w10: U1.14 v1@193.22,442.13
  Top Layer w12: J1.5 -941.45,-336.24 -972.69,-305.01 -972.69,240.41 -965.66,247.44 -682.2,247.44 -665.59,230.83 -665.59,201.38 -586.27,201.38 -586.27,299.8 -577.53,299.8 -425.53,451.79 -291.76,451.79 -291.76,454.36 -246.7,499.42 -175.42,499.42 v1(-175.14,499.7) ; v1@193.22,442.13 196.26,439.09 v1(198.34,439.09)
  Bottom Layer w12: v1(-175.14,499.7) -124.36,448.92 29.18,448.92 29.86,449.6 168.06,449.6 198.34,479.87 v1(198.34,439.09)
NetJ1_6: J1.6 U1.18 | length 4868.2
  Top Layer w10: U1.18 69.39,523.25 78.91,532.77 80.32,532.77
  Top Layer w12: v1(-897.15,-451.46) -894.53,-451.46 -879.32,-436.24 J1.6 ; 80.32,532.77 127.22,579.67 152.55,579.67 160.9,588.02 160.9,592.06 v1(161.61,592.78) ; v1(236.13,814.8) 402.34,814.8 705.56,1118.01 v1(705.56,1142.91)
  Bottom Layer w12: v1(-897.15,-451.46) -899.17,-453.48 -899.17,-516.04 -939.69,-556.56 -1060.54,-556.56 -1060.54,1142.91 v1(705.56,1142.91) ; v1@162.33,593.5 v1(161.61,592.78) 178.84,592.78 178.84,632.47 185.87,639.5 201.39,639.5 201.39,780.05 v1(236.13,814.8)
NetJ1_7: J1.7 U1.19 | length 5484.4
  Top Layer w10: U1.19 49.7,531.26
  Top Layer w12: v1(-949.1,-533.84) -947.9,-535.04 -778.16,-535.04 J1.7 ; v1(-874.66,1107.81) -127.97,1107.81 v1(-127.97,1108.95) ; v1(-110.09,872.64) -111.12,871.61 -111.12,730.75 v1(136.77,730.75) ; 49.7,531.26 56.28,537.84 57.28,537.84 120.5,601.06 134.84,601.06 141.87,608.09 141.87,616.58 153.27,627.98 v1(153.27,628.99)
  Bottom Layer w12: v1(-949.1,-533.84) -1029.18,-533.84 -1029.18,1106.68 -881.46,1106.68 -881.46,1107.81 v1(-874.66,1107.81) ; v1(-127.97,1108.95) -125.89,1108.95 -121.6,1113.24 631.24,1113.24 635.53,1108.95 716.3,1108.95 716.3,966.63 669.4,966.63 613.76,910.99 186.72,910.99 186.72,997.25 169.92,1014.04 169.92,1015.45 156.03,1029.35 154.61,1029.35 144.95,1039.01 56.27,1039.01 v1(-110.09,872.64) ; v1(136.77,730.75) 155.38,712.13 155.38,672.39 153.27,670.29 v1(153.27,628.99)
NetJ1_8: J1.8 U1.20 | length 3357.9
  Top Layer w10: U1.20 30.02,545.42
  Top Layer w12: v1(-925.43,1005.19) -1005.87,1005.19 -1011.73,999.33 -1011.73,-569.43 -944.92,-636.24 J1.8 ; v1(-818.72,879.17) -552.93,879.17 -466.66,792.9 -417.24,792.9 -416.24,791.9 -279.47,791.9 -278.81,792.56 -268.87,792.56 -240.32,764.01 -240.32,671.62 -212.62,643.92 v1(-51.89,643.92) ; 30.02,545.42 40.31,555.71 43.03,555.71 v1(90.99,603.67)
  Bottom Layer w12: v1(-925.43,1005.19) -906.35,1024.27 -859.19,1024.27 -859.19,919.63 v1(-818.72,879.17) ; v1(-51.89,643.92) -32.16,624.19 46.46,624.19 56.8,613.84 56.93,613.84 66.14,604.62 90.03,604.62 v1(90.99,603.67)
NetJ2_1: J2.1 U1.29 | length 1729.4
  Top Layer w10: v1(-175.24,356.89) -175.24,374.46 -169.38,380.32 -156.37,380.32 -133.24,403.44 -99.88,403.44 -99.27,402.84 -74.39,402.84 U1.29 U1.29@-81.05,402.76
  Top Layer w12: v1(-175.8,100.24) 46.18,100.24 v1(46.18,98.42) ; v1(279.07,-40.77) 327.65,-40.77 327.65,15.63 v1(341.84,15.63) ; v1(461.92,95.69) 693.9,95.69 693.9,47.48 823.04,47.48 J2.1
  Bottom Layer w12: v1(-175.8,100.24) -175.24,100.24 v1(-175.24,356.89) ; v1(46.18,98.42) 46.18,3.05 56.68,-7.45 88.18,-7.45 88.18,-38.95 276.34,-38.95 276.34,-40.77 v1(279.07,-40.77) ; v1(341.84,15.63) 341.84,95.69 v1(461.92,95.69)
NetJ2_2: J2.2 U1.25 | length 1810.3
  Top Layer w10: -90.05,481.58 -74.39,481.58 U1.25
  Top Layer w12: -90.05,481.58 v1(-90.05,502.61) ; v1(163.53,505.94) 232.45,574.86 232.45,599.34 v1(232.81,599.7) v1@230.19,599.7 ; v1(702.09,488.68) 702.09,280.83 719.69,263.23 719.69,260.95 v1(720.41,260.23) ; v1(721.5,-36.75) 721.76,-36.5 822.79,-36.5 J2.2
  Bottom Layer w12: v1(-90.05,502.61) 130.62,502.61 133.95,505.94 v1(163.53,505.94) ; v1(232.81,599.7) 232.81,596.89 317.44,596.89 324.47,603.92 324.47,613.86 282.07,656.25 282.07,674.27 294.81,687.01 312.83,687.01 325.57,674.27 325.57,671.62 402.39,594.8 435.29,594.8 435.29,534.48 442.32,527.45 584.58,527.45 650.07,461.95 668.08,461.95 680.82,474.69 680.82,483.3 687.85,490.33 697.79,490.33 698.72,489.4 701.37,489.4 v1(702.09,488.68) ; v1(720.41,260.23) 720.95,259.68 720.95,-36.2 v1(721.5,-36.75)
NetJ2_3: J2.3 U1.26 | length 1970.5
  Top Layer w10: -95.97,461.81 U1.26
  Top Layer w12: v1@-100.37,542.7 v1(-99.35,542.7) -100.07,541.98 -100.07,523.35 -111.8,511.62 -111.8,475.22 -98.29,461.7 -95.97,461.7 ; v1@46.46,592.02 v1(47.19,591.28) 47.91,592 51.21,592 69.24,610.03 69.24,612.68 81.98,625.42 118.94,625.42 144.26,650.74 173.36,650.74 193.52,630.58 203.46,630.58 208.5,635.62 216.13,643.25 222.77,643.25 228.14,648.61 ; 228.14,648.64 240.74,661.24 258.76,661.24 286.85,633.15 296.79,633.15 303.82,640.18 v1(303.82,665.26) v1@302.5,663.94 ; v3(762.43,261.36) 763.33,261.36 v3(763.33,383.71) ; J2.3 895.43,-63.85 v1(895.43,182.59)
  Bottom Layer w12: v1(-99.35,542.7) -23.64,542.7 -2.95,563.39 19.3,563.39 v1(47.19,591.28) v1@47.19,588.66 ; v1(303.82,665.26) 404.05,565.03 404.05,390.11 411.08,383.08 518.04,383.08 519.04,384.08 554.16,384.08 555.16,383.08 568.04,383.08 569.04,384.08 604.16,384.08 605.16,383.08 618.04,383.08 619.04,384.08 654.16,384.08 655.16,383.08 668.04,383.08 669.04,384.08 704.16,384.08 705.16,383.08 718.04,383.08 719.04,384.08 762.96,384.08 v3(763.33,383.71) ; v3(762.43,261.36) 762.43,231.35 846.67,231.35 v1(895.43,182.59)
NetJ2_4: J2.4 U1.17 | length 4451.7
  Top Layer w10: U1.17 U1.17@89.07,513.82
  Top Layer w12: U1.17@93.3,517.43 104.53,528.65 129.64,528.65 224.36,623.38 231.01,623.38 247.13,639.5 v1(249.75,639.5) ; v1(287.58,781.94) 436.93,781.94 517.53,862.53 517.53,901.87 533.86,918.2 1019.25,918.2 1025.11,912.34 1025.11,-952.92 859.06,-1118.96 v1(672.66,-1118.96) ; v1(731.03,-278.95) 770.42,-239.56 819.72,-239.56 J2.4
  Bottom Layer w12: v1(249.75,639.5) 249.75,744.11 v1(287.58,781.94) ; v1(672.66,-1118.96) 672.66,-337.32 v1(731.03,-278.95)
NetJ2_5: J2.5 U1.16 | length 2184.2
  Top Layer w10: U1.16@114.85,481.68 174,481.68
  Top Layer w12: 174,481.68 478.73,786.42 906.93,786.42 954.49,738.86 954.49,272.18 938.69,256.39 922.99,256.39 v1(919.15,260.23) ; J2.5 823.53,-335.75 912.74,-335.75 v1(913.23,-335.27)
  Bottom Layer w12: v1(913.23,-335.27) 913.23,-333.19 919.15,-327.26 v1(919.15,260.23)
NetJ2_6: J2.6 U1.15 | length 1729.3
  Top Layer w10: U1.15 213.87,461.81
  Top Layer w12: 213.87,461.81 439.16,236.51 950.01,236.51 v1(950.64,235.88) ; J2.6 900.35,-436.24 913.16,-449.05 v1(915.24,-449.05)
  Bottom Layer w12: v1(915.24,-449.05) 917.32,-449.05 921.52,-444.85 923.93,-444.85 950.64,-418.14 v1(950.64,235.88)
NetJ2_7: J2.7 U1.11 | length 1322.9
  Top Layer w10: U1.11 142.39,383.07
  Top Layer w12: 142.39,383.07 204.53,320.93 204.53,274.76 v1(203.51,273.74) ; v1(296.57,275.34) 332.1,239.81 332.1,141.47 588.94,-115.37 588.94,-288.44 740.64,-440.14 740.64,-515.75 761.13,-536.24 J2.7
  Bottom Layer w12: v1(203.51,273.74) 294.97,273.74 v1(296.57,275.34)
NetJ2_8: J2.8 U1.10 | length 1386.4
  Top Layer w10: U1.10@114.74,363.31 132.3,363.31
  Top Layer w12: U1.10 U1.10@114.74,363.31 ; 132.3,363.31 152.59,343.02 v1(152.59,340.74) ; v1(253,319.17) 273.85,298.32 273.85,140.37 552.58,-138.35 552.58,-284.86 718.27,-450.55 718.27,-528.59 757.29,-567.61 757.29,-630.39 763.15,-636.24 J2.8
  Bottom Layer w12: v1(152.59,340.74) 176.31,317.02 250.85,317.02 v1(253,319.17)
NetJ2_9: J2.9 U1.9 | length 4369.4
  Top Layer w10: 114.66,-79.83 U1.9
  Top Layer w12: 114.66,-79.83 -617.38,-79.83 -622.67,-85.12 -797.21,-85.12 -802.5,-79.83 -819.74,-79.83 -852.03,-112.12 -852.03,-151.78 -830.54,-151.78 -797.21,-185.12 189.53,-185.12 222.86,-151.78 253.15,-151.78 253.15,-188.37 552.01,-487.23 552.01,-747.18 731.85,-927.02 731.85,-974.28 791.96,-974.28 802.79,-985.12 889.15,-985.12 912.94,-961.33 912.94,-784.12 797.22,-784.12 706.27,-693.17 706.27,-684.89 712.13,-679.03 720.41,-679.03 773.04,-731.65 818.45,-731.65 J2.9
NetJ2_10: J2.10 U1.4 | length 1629.6
  Top Layer w10: 10.33,257 U1.4
  Top Layer w12: v1(-34.51,212.16) 10.33,257 ; v1(408.71,-240.4) 684.68,-516.36 684.68,-734.45 774.99,-824.76 811.56,-824.76 J2.10
  Bottom Layer w12: v1(-34.51,212.16) 16.06,161.59 152.66,161.59 407.58,-93.34 407.58,-239.27 v1(408.71,-240.4)
NetJ2_11: J2.11 U1.2 | length 1756.6
  Top Layer w10: -29.04,294.91 U1.2
  Top Layer w12: v1(-69.45,206.53) -69.45,206.95 -69.87,207.37 -69.87,254.08 -29.04,294.91 ; v1(366,-243.89) 652.93,-530.81 652.93,-740.74 751.72,-839.53 751.72,-921.61 766.35,-936.24 J2.11
  Bottom Layer w12: v1(-69.45,206.53) 4.85,132.23 145.33,132.23 366,-88.44 v1(366,-243.89)
NetJ2_12: J2.12 U1.31 | length 3589.5
  Top Layer w10: -98.39,363.39 U1.31
  Top Layer w12: v1(-147.93,590.13) -204.62,533.44 -204.62,525.15 -198.77,519.29 -187.68,519.29 -183.83,523.14 -165.02,523.14 -151.71,509.83 -151.71,491.01 -165.02,477.7 -210.44,477.7 -223.53,464.61 -223.53,451.21 -152.99,451.21 -152.99,410.39 -164.19,399.19 -217.12,399.19 -222.97,393.33 -222.97,385.05 -242.97,385.05 -242.97,327.36 -235.94,320.33 -99,320.33 -99,329.47 -106.03,336.5 -106.23,336.5 -106.23,354.93 -98.39,362.78 ; v1(271.49,364.83) 271.49,360.28 414.13,217.64 417.41,217.64 417.41,198.46 880.55,198.46 886.43,204.34 904.44,204.34 910.32,198.46 937.95,198.46 937.95,-964.42 869.01,-1033.37 825.92,-1033.37 J2.12
  Bottom Layer w12: v1(-147.93,590.13) -145.31,590.13 -63.83,671.61 -28.67,671.61 -5.95,648.89 75.1,648.89 98.58,625.42 99.99,625.42 111.73,613.68 130.11,613.68 130.11,592.85 ; 128.45,593.88 81.98,547.41 202.1,547.41 202.1,526.68 247.62,481.17 271.49,481.17 v1(271.49,364.83)
NetMOSFET1_3: MOSFET1.3 U2.7 | length 172.6
  Bottom Layer w12: MOSFET1.3 -276.1,-255.05 -276.1,-200.66 U2.7
NetU1_1: U1.1 U3.5 | length 942.2
  Top Layer w10: -48.72,305.67 U1.1
  Top Layer w12: U3.5 -647.28,431.17 -613.6,431.17 -613.6,448.77 v1(-579.76,448.77) ; v1(-320.23,428.08) -321.32,426.99 -321.32,383.56 -298.14,383.56 -298.14,362.67 -268.75,333.28 -268.75,323.34 -310.43,281.65 -310.43,271.71 -303.4,264.68 -149.07,264.68 -149.07,213.6 -140.79,213.6 -48.72,305.67
  Bottom Layer w12: v1(-579.76,448.77) -579.76,428.08 v1(-320.23,428.08)
NetU1_5: U1.5 U3.1 | length 2196.9
  Top Layer w10: 30.02,224.83 U1.5
  Top Layer w12: U3.1 -645.34,329.63 -644.34,328.63 v1(-644.34,240.33) ; v1(15.47,224.83) 30.02,224.83
  Bottom Layer w12: v1(-644.34,240.33) -644.34,183.2 -472.47,11.34 -142.83,11.34 -136.97,17.2 -136.97,189.31 -29.83,296.46 262.41,296.46 267.41,301.46 457.89,301.46 471.2,288.15 471.2,269.33 470.01,269.33 457.68,256.99 386.53,256.99 379.5,249.96 379.5,215.57 15.47,215.57 v1(15.47,224.83)
NetU1_24: U1.24 U3.3 | length 754.7
  Top Layer w10: U1.24 -48.72,533.31
  Top Layer w12: U3.3 -566.59,380.81 -450.11,497.28 -276.94,497.28 -161.37,612.85 -138.52,612.85 -70.55,544.88 -60.29,544.88 -48.72,533.31
NetU3_15: U3.15 USB1.3 | length 1353.3
  Top Layer w12: v1(-887.15,937.62) -887.15,939.23 -795.31,1031.06 v1(-124.58,1031.06) ; v1(-886.35,739.76) -885.45,738.86 -885.45,663.81 -883.95,662.31 U3.15 ; v1(10.6,1046.68) 55.15,1046.68 67.73,1034.1 67.47,1034.1 USB1.3 USB1.3@67.09,979.04
  Bottom Layer w12: v1(-887.15,937.62) -887.15,740.56 v1(-886.35,739.76) ; v1(-124.58,1031.06) -122.85,1032.8 9.22,1032.8 9.22,1046.68 v1(10.6,1046.68)
NetU3_16: U3.16 USB1.2 | length 1337.3
  Top Layer w12: U3.16 -905.93,636.72 -912.96,643.74 -912.96,852.63 -848.89,916.69 86.03,916.69 93.06,923.72 USB1.2
VIN: C6.2 Cap1.1 D2.C D3.C MOSFET1.1 R6.2 U2.8 | length 5547.5
  Top Layer w20: v1(-501.24,-9) -84.31,-9 v1(-84.31,0.73) ; v1(-159.77,-426.12) -160.75,-425.14 v1(-160.75,-294.88) 63.41,-294.88 v1(63.41,-212.19)
  Bottom Layer w12: -262.34,-175.06 U2.8
  Bottom Layer w20: R6.2 -546.93,-7.6 ; v1(-501.24,-9) -501.24,-7.6 -546.93,-7.6 ; C6.2 -50.25,-46.72 ; MOSFET1.1 -328.15,-175.61 -262.89,-175.61 -262.34,-175.06 -236.76,-149.48 -174.72,-149.48 -137.42,-186.78 -137.42,-272.52 -159.77,-294.88 v1(-160.75,-294.88) ; v1(-159.77,-426.12) -159.77,-428.17 -130.97,-456.97 -6.49,-456.97 5.22,-445.26 5.22,-381.98 Cap1.1 ; v1(-84.31,0.73) -50.25,0.73 -50.25,-46.72 ; v1(63.41,-212.19) 63.41,-46.72 ; 63.6,-46.72 63.41,-46.72 ; D3.C 535.22,1004.98 634.81,1004.98 646.53,1016.69 646.53,1064.19 621.35,1089.36 D2.C -955.7,1064.39 -970.13,1049.96 -970.13,215.87 -958.42,204.15 -758.68,204.15 -546.93,-7.6 ; -50.25,-46.72 63.41,-46.72
pads on no net: IC1.1 IC1.4 MOSFET1.2 MOSFET1.5 MOSFET1.6 U1.8 U1.32 U2.3 U3.6 U3.8 U3.9 U3.10 U3.11 U3.12 U3.13 U3.14 U3.19 U3.22 U3.23 U3.24 U3.26 U3.27 U3.28

## Polygon pours and split planes (outlines as drawn)
GND on Bottom Layer "GND_L02_P000" (solid, remove dead copper, pour order 0): -1080.79,1124.26 -1080.11,1124.95 1084.3,1124.95 1084.3,-1118.49 1084.68,-1118.88 1078.08,-1125.48 -1083.26,-1125.48
GND on Top Layer "GND_L01_P001" (solid, remove dead copper, pour order 1): -1080.79,1124.26 1083.61,1124.26 1084.3,1124.95 1084.68,1124.56 1084.68,-1125.48 -1079.72,-1125.48 -1083.26,-1121.95

## Silkscreen, mask and mechanical layers (free items; w line width, h text height)
Mechanical 1:
  lines w7.87: 668.8,825.98 ccw(c668.8,825.98) 668.8,825.98 ; 668.8,825.98 ccw(c668.8,825.99) 668.8,825.98 ; -1096.49,-1113.8 ccw(c-1046.49,-1113.8) -1046.49,-1163.8 -943.83,-1163.8 -876.83,-1163.8 915.37,-1163.8 918.36,-1163.8 1045.75,-1163.8 ccw(c1045.75,-1113.8) 1095.75,-1113.8 1095.75,1110.63 ccw(c1045.75,1110.63) 1045.75,1160.63 918.36,1160.63 618.8,1160.63 -718.21,1160.63 -876.83,1160.63 -965.23,1160.63 -1046.49,1160.63 ccw(c-1046.49,1110.63) -1096.49,1110.63 -1096.49,-1113.8 ; -768.21,-564.17 ccw(c-768.21,-564.17) -768.21,-564.17 ; -768.21,825.98 ccw(c-768.21,825.99) -768.21,825.98

## Dimensions
-776.96,-1036.24 to 823.04,-1036.24 on Mechanical 10

## Text inside footprints (layer, text, board x,y; h text height)
MOSFET1: Bottom Overlay "*" at -305.64,-163.25 h50; Mechanical 13 "*" at -350.39,-209.65 h50
USB1: Mechanical 13 "PCB EDGE" at 157.47,1157.21 h20 r180